# EAGLE board TeensyServoController (EAGLE 7.2.0)
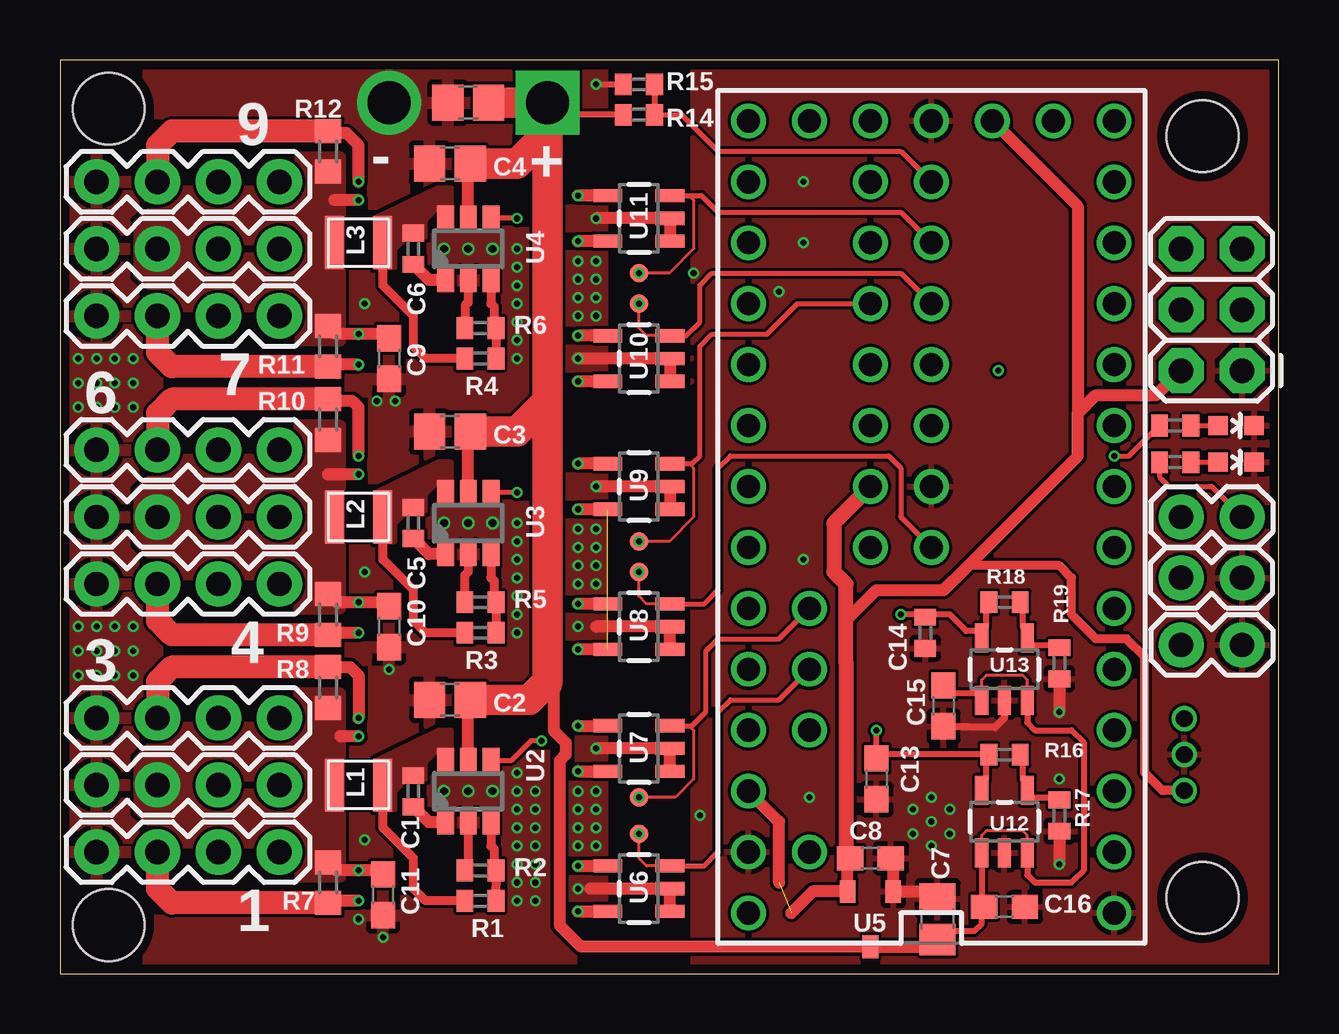
[diagram p0: board, top side]
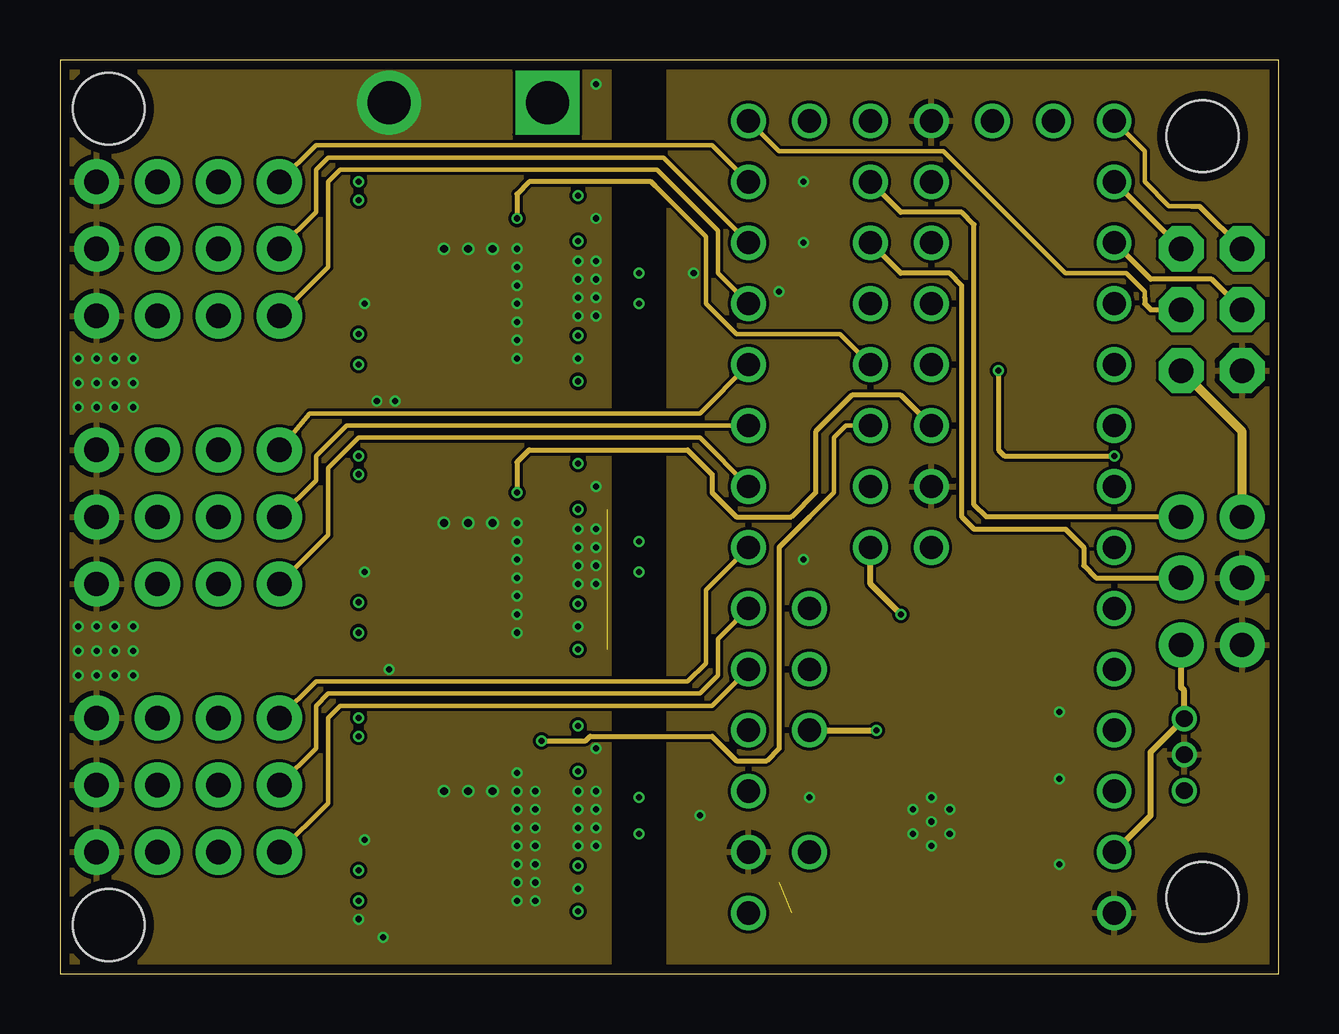
[diagram p1: board, inner layer Route2]
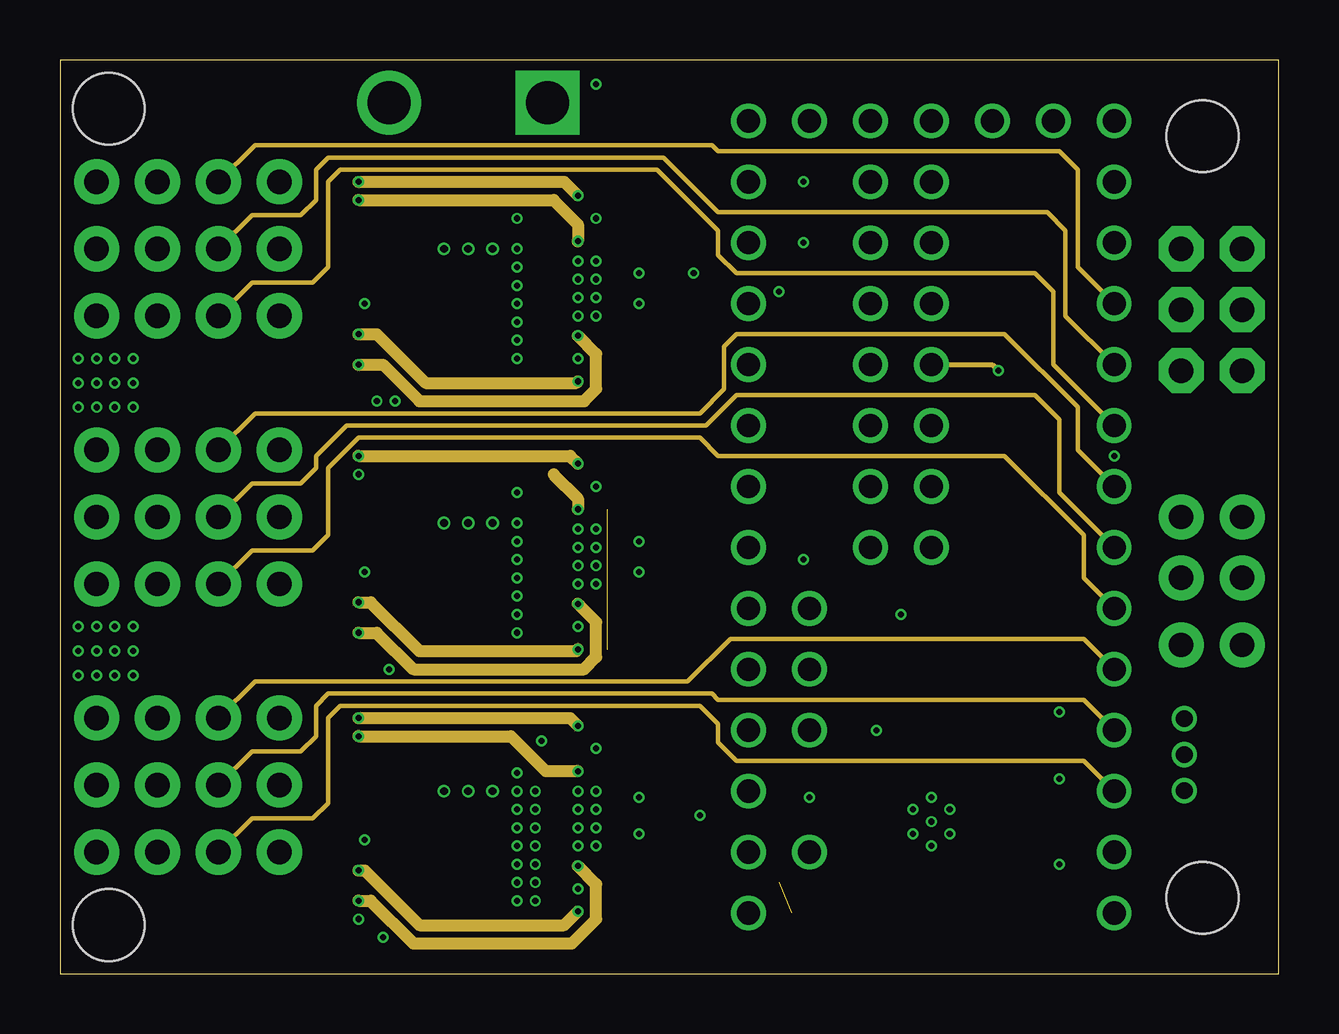
[diagram p2: board, inner layer Route15]
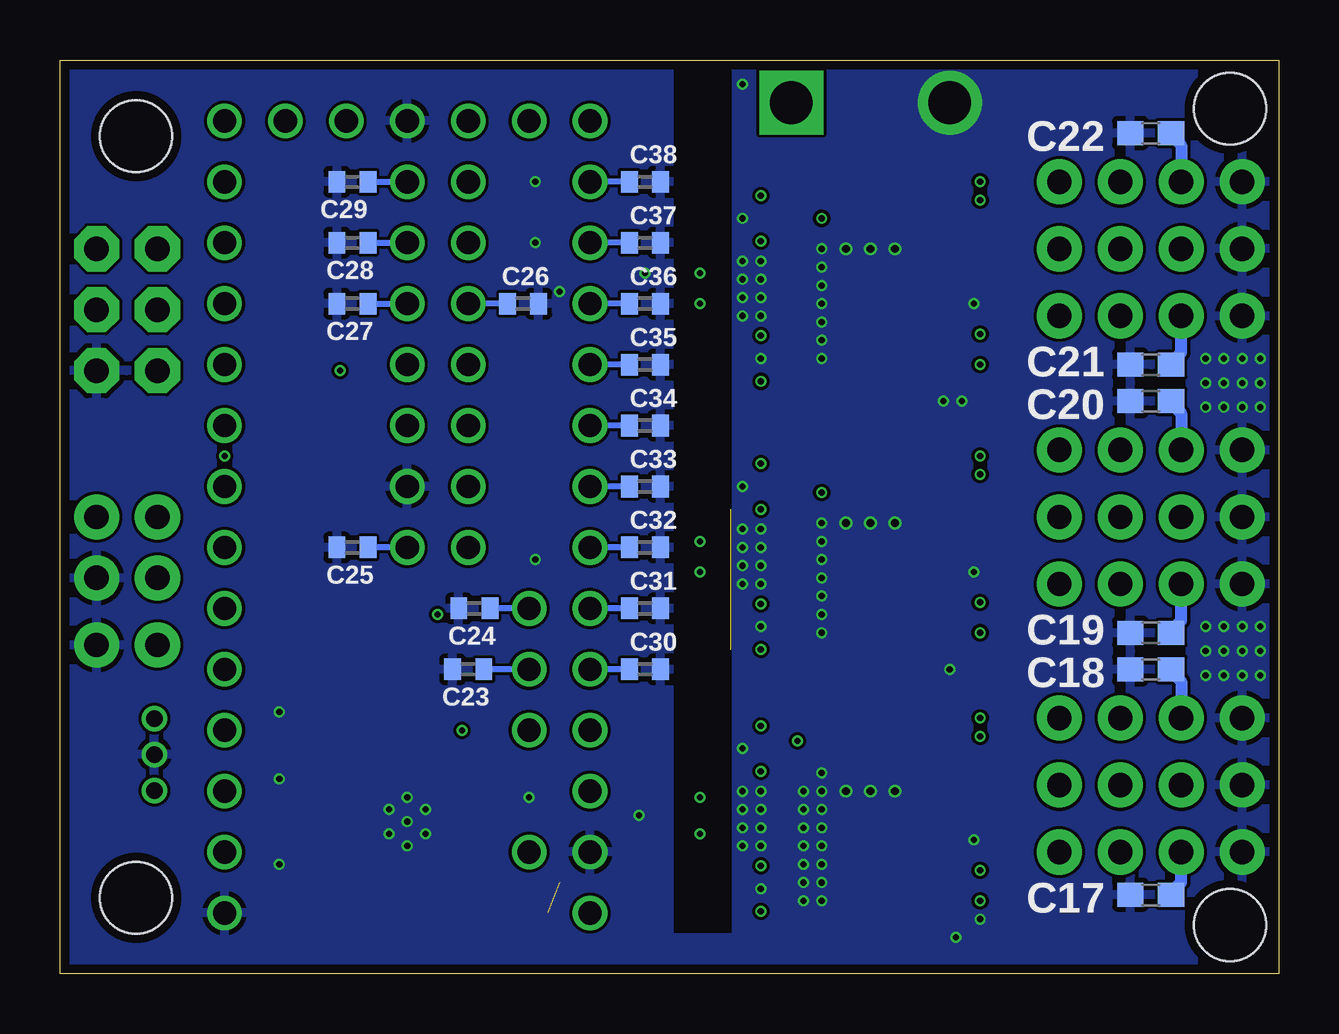
[diagram p3: board, bottom side, seen from below]

Size 50.8 x 38.1 mm. Coordinates in mm from the lower left corner, seen from the top.
Outline: 0,0 50.8,0 50.8,38.1 0,38.1 0,0
Copper layers (1*2*15*16): Top 0.035559375mm / dielectric 0.17018125mm / Route2 0.01778125mm / dielectric 47mil / Route15 0.01778125mm / dielectric 0.17018125mm / Bottom 0.035559375mm
Design rules "OSHPark-4layer *": minimum track width 5mil, minimum drill 10mil, track to track 5mil, track to pad 5mil, pad to pad 5mil, via to via 5mil, smd to smd 5mil, copper to edge 15mil, drill to drill 6mil, minimum pad ring 4mil, minimum via ring 4mil, stop-mask expansion 4mil, vias tented up to drill 25mil, thermal gap 8mil
Holes 3 mm at 47.62,34.92 47.62,3.17 2.03,36.07 2.03,2.03

## Footprints (pad centres in the part's own frame; a part is rotated, then mirrored left to right if it is on the bottom)
C0402 = smd 0.7 x 0.9: 1 -0.65,0; 2 0.65,0
C0805 = smd 1.3 x 1.5: 1 -0.85,0; 2 0.85,0
C0603 = smd 1.1 x 1: 1 -0.85,0; 2 0.85,0
1X04 = drill 1.016 pad 1.88: 1 0,0; 2 2.54,0; 3 5.08,0; 4 7.62,0
1X02 = drill 1.016 pad 1.88: 1 0,0; 2 2.54,0
3-PIN_JST_ZH_CONNECTOR_TH = drill 0.7: P$1 -1.5,1.6; P$2 0,1.6; P$3 1.5,1.6
2X3 = drill 1.016 pad 1.88 octagon: 1 0,0; 2 0,2.54; 3 2.54,0; 4 2.54,2.54; 5 5.08,0; 6 5.08,2.54
1008 = smd 0.8 x 2.2: P$1 -1,0; P$2 1,0
LED-0603 = smd 0.8 x 0.8: A 0,-0.75; C 0,0.75
R0402 = smd 0.7 x 0.9: 1 -0.65,0; 2 0.65,0
R0603 = smd 1 x 1.1: 1 -0.85,0; 2 0.85,0
PAD.03X.03 = smd 0.762 x 0.762: P$1 0,0
TEENSY_3.0_ALLPINS = drill 0.965: 0 -7.62,13.97; 1 -7.62,11.43; 2 -7.62,8.89; 3 -7.62,6.35; 3.3V 7.62,11.43; 3.3V1 -2.54,-16.51; 3.3V2 2.54,-1.27; 4 -7.62,3.81; 5 -7.62,1.27; 6 -7.62,-1.27; 7 -7.62,-3.81; 8 -7.62,-6.35; 9 -7.62,-8.89; 10 -7.62,-11.43; 11 -7.62,-13.97; 12 -7.62,-16.51; 13 7.62,-16.51; 14/A0 7.62,-13.97; 15/A1 7.62,-11.43; 16/A2 7.62,-8.89; 17/A3 7.62,-6.35; 18/A4 7.62,-3.81; 19/A5 7.62,-1.27; 20/A6 7.62,1.27; 21/A7 7.62,3.81; 22/A8 7.62,6.35; 23/A9 7.62,8.89; 24 0,-3.81; 25 0,-6.35; 26 0,-8.89; 27 0,-11.43; 28 0,-13.97; 29 2.54,-13.97; 30 2.54,-11.43; 31 2.54,-8.89; 32 2.54,-6.35; 33 2.54,-3.81; A10 5.08,6.35; A11 5.08,3.81; A12 0,1.27; A13 2.54,1.27; AGND 7.62,13.97; AREF 5.08,8.89; GND -7.62,16.51; GND1 0,-16.51; GND2 0,-1.27; PGM 2.54,-16.51; RESET 5.08,-16.51; VBAT -5.08,-16.51; VIN 7.62,16.51; VUSB 5.08,13.97
SOT-23-6 = smd 0.7 x 1: 1 -0.95,-1.3; 2 0,-1.3; 3 0.95,-1.3; 4 0.95,1.3; 5 0,1.3; 6 -0.95,1.3
SOT23 = smd 0.65 x 0.95: P$1 -0.95,-1.15; P$2 0.95,-1.15; P$3 0,1.15
SOT23-5 = smd 0.55 x 1.2: 1 -0.95,-1.3; 2 0,-1.3; 3 0.95,-1.3; 4 0.95,1.3; 5 -0.95,1.3

## Placement (x,y rotation side)
C1  10nF  [C0402]  14.73,7.62 270 top
C2  10uF  [C0805]  16.26,11.43 180 top
C3  10uF  [C0805]  16.26,22.61 180 top
C4  10uF  [C0805]  16.26,33.78 180 top
C5  10nF  [C0402]  14.73,18.8 270 top
C6  10nF  [C0402]  14.73,30.23 270 top
C7  10uF  [C0805]  36.58,2.29 90 top
C8  1uF  [C0603]  33.78,4.83 0 top
C9  22uF  [C0603]  13.72,25.65 270 top
C10  22uF  [C0603]  13.72,14.48 270 top
C11  22uF  [C0603]  13.46,3.3 270 top
C12  22uF  [C0805]  17.02,36.32 180 top
C13  1uF  [C0603]  34.04,8.14 270 top
C14  0.1uF  [C0402]  36.07,14.22 270 top
C15  0.1uF  [C0603]  36.83,11.18 270 top
C16  1uF  [C0603]  39.37,2.79 0 top
C17  1uF  [C0603]  5.33,3.3 180 bottom
C18  1uF  [C0603]  5.33,12.7 180 bottom
C19  1uF  [C0603]  5.33,14.22 180 bottom
C20  1uF  [C0603]  5.33,23.88 180 bottom
C21  1uF  [C0603]  5.33,25.4 180 bottom
C22  1uF  [C0603]  5.33,35.05 180 bottom
C23  0.1uF  [C0402]  33.78,12.7 180 bottom
C24  0.1uF  [C0402]  33.53,15.24 180 bottom
C25  0.1uF  [C0402]  38.61,17.78 180 bottom
C26  0.1uF  [C0402]  31.5,27.94 0 bottom
C27  0.1uF  [C0402]  38.61,27.94 180 bottom
C28  0.1uF  [C0402]  38.61,30.48 180 bottom
C29  0.1uF  [C0402]  38.61,33.02 180 bottom
C30  0.1uF  [C0402]  26.42,12.7 0 bottom
C31  0.1uF  [C0402]  26.42,15.24 0 bottom
C32  0.1uF  [C0402]  26.42,17.78 0 bottom
C33  0.1uF  [C0402]  26.42,20.32 0 bottom
C34  0.1uF  [C0402]  26.42,22.86 0 bottom
C35  0.1uF  [C0402]  26.42,25.4 0 bottom
C36  0.1uF  [C0402]  26.42,27.94 0 bottom
C37  0.1uF  [C0402]  26.42,30.48 0 bottom
C38  0.1uF  [C0402]  26.42,33.02 0 bottom
JP1  [1X04]  1.52,5.08 0 top
JP2  [1X04]  1.52,7.87 0 top
JP3  [1X04]  1.52,10.67 0 top
JP4  [1X04]  1.52,16.26 0 top
JP5  [1X04]  1.52,19.05 0 top
JP6  [1X04]  1.52,21.84 0 top
JP7  [1X04]  1.52,27.43 0 top
JP8  [1X04]  1.52,30.23 0 top
JP9  [1X04]  1.52,33.02 0 top
JP10  [1X02]  46.74,13.72 0 top
JP11  3-PIN_JST_ZH_PTH_CONNECTORRIGHT_ANGLE_PTH  [3-PIN_JST_ZH_CONNECTOR_TH]  48.46,9.14 90 top
JP12  [2X3]  49.28,25.15 90 top
JP14  [1X02]  46.74,19.05 0 top
JP15  [1X02]  49.28,16.51 180 top
L1  4.7uH  [1008]  12.45,7.87 180 top
L2  4.7uH  [1008]  12.45,19.05 180 top
L3  4.7uH  [1008]  12.45,30.48 180 top
LED1  red  [LED-0603]  49.02,21.34 270 top
LED2  blue  [LED-0603]  49.02,22.86 270 top
R1  349k  [R0402]  17.53,3.05 180 top
R2  49.9k  [R0402]  17.53,4.32 0 top
R3  349k  [R0402]  17.53,14.22 180 top
R4  349k  [R0402]  17.53,25.65 180 top
R5  49.9k  [R0402]  17.53,15.49 0 top
R6  49.9k  [R0402]  17.53,26.92 0 top
R7  0.027  [R0603]  11.18,3.81 270 top
R8  0.027  [R0603]  11.18,11.94 90 top
R9  0.027  [R0603]  11.18,14.99 270 top
R10  0.027  [R0603]  11.18,23.11 90 top
R11  0.027  [R0603]  11.18,26.16 270 top
R12  0.027  [R0603]  11.18,34.29 90 top
R13  [R0402]  46.48,21.34 180 top
R14  150k  [R0402]  24.13,35.81 180 top
R15  49.9k  [R0402]  24.13,37.08 0 top
R16  [R0402]  39.37,9.14 180 top
R17  255k  [R0402]  41.66,6.6 90 top
R18  [R0402]  39.37,15.49 180 top
R19  255k  [R0402]  41.66,12.95 90 top
R20  91  [R0402]  46.48,22.86 180 top
TP1  [PAD.03X.03]  24.13,5.84 0 top
TP2  [PAD.03X.03]  24.13,7.37 0 top
TP3  [PAD.03X.03]  24.13,16.76 0 top
TP4  [PAD.03X.03]  24.13,18.03 0 top
TP5  [PAD.03X.03]  24.13,27.94 0 top
TP6  [PAD.03X.03]  24.13,29.21 0 top
U1  TEENSY_3.1_ALLPINS  [TEENSY_3.0_ALLPINS]  36.32,19.05 180 top
U2  AP3211KTR-G1  [SOT-23-6]  17.02,7.62 0 top
U3  AP3211KTR-G1  [SOT-23-6]  17.02,18.8 0 top
U4  AP3211KTR-G1  [SOT-23-6]  17.02,30.23 0 top
U5  AP2210N-3.3TRG1  [SOT23]  33.78,2.29 180 top
U6  [SOT23-5]  24.13,3.56 90 top
U7  [SOT23-5]  24.13,9.4 90 top
U8  [SOT23-5]  24.13,14.48 90 top
U9  [SOT23-5]  24.13,20.32 90 top
U10  [SOT23-5]  24.13,25.65 90 top
U11  [SOT23-5]  24.13,31.5 90 top
U12  MIC5225  [SOT23-5]  39.37,6.35 0 top
U13  MIC5225  [SOT23-5]  39.37,12.7 0 top

## Library data of the parts
C1-C38 R1-R20 = resistor
JP1-JP10 JP12 JP14 JP15 = SparkFun-Connectors
JP11 U2-U13 = My Parts
L1-L3 = inductors
LED1 LED2 = SparkFun-LED
TP1-TP6 = SparkFun-Passives
U1 = Teensy3.0

## Nets
ANALOG-1: C30.1 JP1.4 U1.22/A8
ANALOG-2: C31.1 JP2.4 U1.21/A7
ANALOG-3: C32.1 JP3.4 U1.20/A6
ANALOG-4: C33.1 JP4.4 U1.19/A5
ANALOG-5: C34.1 JP5.4 U1.18/A4
ANALOG-6: C35.1 JP6.4 U1.17/A3
ANALOG-7: C36.1 JP7.4 U1.16/A2
ANALOG-8: C37.1 JP8.4 U1.15/A1
ANALOG-9: C38.1 JP9.4 U1.14/A0
AREF: C13.1 R16.2 U1.AREF U12.5
AREF2: C14.1 R18.2 U1.A13 U13.5
BATT_SENSE: C29.1 R14.1 R15.2 U1.28
CS0: JP12.3 U1.10
CURRENT-1: C23.1 TP1.P$1 U1.A10 U6.3
CURRENT-3: C24.1 TP2.P$1 U1.A11 U7.3
CURRENT-4: C25.1 TP3.P$1 U1.A12 U8.3
CURRENT-6: C26.1 TP4.P$1 U1.31 U9.3
CURRENT-7: C27.1 TP5.P$1 U1.26 U10.3
CURRENT-9: C28.1 TP6.P$1 U1.27 U11.3
EN-1: U1.33 U2.4
EN-2: U1.24 U3.4
EN-3: U1.32 U4.4
GND: C2.2 C3.2 C4.2 C7.2 C8.2 C9.2 C10.2 C11.2 C12.2 C13.2 C14.2 C15.2 C16.2 C17.2 C18.2 C19.2 C20.2 C21.2 C22.2 C23.2 C24.2 C25.2 C26.2 C27.2 C28.2 C29.2 C30.2 C31.2 C32.2 C33.2 C34.2 C35.2 C36.2 C37.2 C38.2 JP1.1 JP2.1 JP3.1 JP4.1 JP5.1 JP6.1 JP7.1 JP8.1 JP9.1 JP10.2 JP11.P$2 JP12.1 JP15.1 LED1.C LED2.C R2.1 R5.1 R6.1 R15.1 R17.1 R19.1 U1.AGND U1.GND U1.GND1 U1.GND2 U2.2 U3.2 U4.2 U5.P$1 U6.1 U6.2 U7.1 U7.2 U8.1 U8.2 U9.1 U9.2 U10.1 U10.2 U11.1 U11.2 U12.2 U13.2
I2C_SCL: JP14.1 U1.29
I2C_SDA: JP15.2 U1.30
MISO/MOSI: JP12.5 U1.12
MOSI/MISO: JP12.6 U1.11
N$1: LED1.A R13.1
N$6: R1.1 R2.2 U2.3
N$7: R16.1 R17.2 U12.4
N$8: R20.2 U1.25
N$9: R18.1 R19.2 U13.4
N$10: LED2.A R20.1
N$11: C5.1 L2.P$1 R3.2 U3.6
N$13: C1.1 L1.P$1 R1.2 U2.6
N$14: C1.2 U2.1
N$16: R4.1 R6.2 U4.3
N$17: C5.2 U3.1
N$18: R3.1 R5.2 U3.3
N$19: C6.2 U4.1
N$20: C6.1 L3.P$1 R4.2 U4.6
SAT-RX: JP10.1 JP11.P$3 U1.0
SCLK: JP12.4 U1.13
SERVO-1: JP1.3 U1.1
SERVO-1_VDD: C17.1 JP1.2 R7.2 U6.4
SERVO-2: JP2.3 U1.2
SERVO-3: JP3.3 U1.3
SERVO-3_VDD: C18.1 JP3.2 R8.2 U7.4
SERVO-4: JP4.3 U1.4
SERVO-4_VDD: C19.1 JP4.2 R9.2 U8.4
SERVO-5: JP5.3 U1.5
SERVO-6: JP6.3 U1.6
SERVO-6_VDD: C20.1 JP6.2 R10.2 U9.4
SERVO-7: JP7.3 U1.7
SERVO-7_VDD: C21.1 JP7.2 R11.2 U10.4
SERVO-8: JP8.3 U1.8
SERVO-9: JP9.3 U1.9
SERVO-9_VDD: C22.1 JP9.2 R12.2 U11.4
SERVO_VDD-1: C11.1 JP2.2 L1.P$2 R7.1 R8.1 U6.5 U7.5
SERVO_VDD-2: C10.1 JP5.2 L2.P$2 R9.1 R10.1 U8.5 U9.5
SERVO_VDD-3: C9.1 JP8.2 L3.P$2 R11.1 R12.1 U10.5 U11.5
VBAT: U1.VBAT
VCC: C2.1 C3.1 C4.1 C7.1 C12.1 C15.1 C16.1 R14.2 U2.5 U3.5 U4.5 U5.P$3 U12.1 U12.3 U13.1 U13.3
VDD: C8.1 JP11.P$1 JP12.2 JP14.2 R13.2 U1.3.3V U1.3.3V1 U1.3.3V2 U5.P$2
VIN: U1.VIN
VUSB: U1.VUSB

## Tracks (layer width: path | path; a pad name or v marks a point on that pad's centre or on a via)
ANALOG-1
  Route2 0.191: JP1.4 11.18,7.11 11.18,10.67 11.68,11.18 27.18,11.18 U1.22/A8
  Bottom 0.254: C30.1 U1.22/A8
ANALOG-2
  Route2 0.191: JP2.4 10.67,9.4 10.67,11.18 11.18,11.68 26.67,11.68 27.43,12.45 27.43,13.97 U1.21/A7
  Bottom 0.254: C31.1 U1.21/A7
ANALOG-3
  Route2 0.191: JP3.4 10.67,12.19 26.16,12.19 26.92,12.95 26.92,16 U1.20/A6
  Bottom 0.254: C32.1 U1.20/A6
ANALOG-4
  Route2 0.191: JP4.4 11.18,18.29 11.18,21.08 12.45,22.35 26.67,22.35 U1.19/A5
  Bottom 0.254: C33.1 U1.19/A5
ANALOG-5
  Route2 0.191: U1.18/A4 11.94,22.86 10.67,21.59 10.67,20.57 JP5.4
  Bottom 0.254: C34.1 U1.18/A4
ANALOG-6
  Route2 0.191: JP6.4 10.41,23.37 26.67,23.37 U1.17/A3
  Bottom 0.254: C35.1 U1.17/A3
ANALOG-7
  Route2 0.191: U1.16/A2 27.43,29.21 27.43,30.99 24.89,33.53 11.68,33.53 11.18,33.02 11.18,29.46 JP7.4
  Bottom 0.254: C36.1 U1.16/A2
ANALOG-8
  Route2 0.191: JP8.4 10.67,31.75 10.67,33.53 11.18,34.04 25.15,34.04 U1.15/A1
  Bottom 0.254: C37.1 U1.15/A1
ANALOG-9
  Route2 0.191: U1.14/A0 27.18,34.54 10.67,34.54 JP9.4
  Bottom 0.254: C38.1 U1.14/A0
AREF  (via drill 0.25)
  Top 0.254: v34.04,10.16 C13.1 34.18,9.14 R16.2 38.61,9.03 38.61,8.13 38.42,7.94 U12.5
  Route2 0.254: U1.AREF v34.04,10.16
AREF2  (via drill 0.25)
  Top 0.254: v35.05,14.99 35.81,14.99 35.93,14.87 C14.1 36.18,14.99 37.08,14.99 37.78,14.29 38.42,14.29 | U13.5 38.42,14.29 | 38.42,14.29 38.61,14.48 38.61,15.38 R18.2
  Route2 0.254: v35.05,14.99 33.78,16.26 U1.A13
BATT_SENSE
  Top 0.203: R14.1 25.91,35.81 27.43,34.29 35.05,34.29 U1.28
  Top 0.254: R15.2 R14.1
  Bottom 0.254: C29.1 U1.28
CS0
  Route2 0.203: JP12.3 48.01,28.96 45.47,28.96 U1.10
CURRENT-1  (via drill 0.25)
  Top 0.127: U6.3 24.45,4.51 24.13,4.83 TP1.P$1
  Top 0.203: U6.3 26.86,4.51 27.43,5.08 27.43,10.92 27.94,11.43 29.97,11.43 U1.A10
  Bottom 0.254: U1.A10 C23.1
  other vias: 24.13,5.84
CURRENT-3  (via drill 0.25)
  Top 0.127: U7.3 26.23,10.35 26.42,10.16 26.42,8.13 25.65,7.37 TP2.P$1
  Top 0.203: U7.3 26.35,10.35 26.92,10.92 26.92,13.46 27.43,13.97 29.97,13.97 U1.A11
  Bottom 0.254: U1.A11 C24.1
  other vias: 24.13,7.37
CURRENT-4  (via drill 0.25)
  Top 0.127: U8.3 24.45,15.43 24.13,15.75 TP3.P$1
  Top 0.203: U8.3 26.86,15.43 27.43,16 27.43,21.08 27.94,21.59 34.54,21.59 35.05,21.08 35.05,19.05 U1.A12
  Bottom 0.254: U1.A12 C25.1
  other vias: 24.13,16.76
CURRENT-6  (via drill 0.25)
  Top 0.127: U9.3 26.23,21.27 26.42,21.08 26.42,19.05 25.4,18.03 TP4.P$1
  Top 0.203: U9.3 26.35,21.27 26.67,21.59 26.67,26.16 27.18,26.67 29.46,26.67 30.73,27.94 U1.31
  Bottom 0.254: C26.1 U1.31
  other vias: 24.13,18.03
CURRENT-7  (via drill 0.25)
  Top 0.127: U10.3 24.45,26.6 24.13,26.92 TP5.P$1
  Top 0.203: U10.3 26.1,26.6 26.67,27.18 26.67,28.7 27.18,29.21 35.05,29.21 U1.26
  Bottom 0.254: C27.1 U1.26
  other vias: 24.13,27.94
CURRENT-9  (via drill 0.25)
  Top 0.127: U11.3 26.23,32.45 26.42,32.26 26.42,30.23 25.4,29.21 TP6.P$1
  Top 0.203: U11.3 26.74,32.45 27.43,31.75 35.05,31.75 U1.27
  Bottom 0.254: C28.1 U1.27
  other vias: 24.13,29.21
EN-1  (via drill 0.25)
  Top 0.203: v20.07,9.72 19.63,9.72 18.8,8.89 18,8.89 U2.4
  Route2 0.191: U1.33 32.77,22.86 32.26,22.35 32.26,20.07 31.24,19.05
  Route2 0.203: 31.24,19.05 29.97,17.78 29.97,9.4 29.46,8.89 28.19,8.89 27.18,9.91 22.1,9.91 21.91,9.72 v20.07,9.72
EN-2  (via drill 0.25)
  Top 0.203: v19.05,20.07 18,20.07 U3.4
  Route2 0.203: U1.24 35.05,24.13 33.02,24.13 31.5,22.61 31.5,20.07 30.48,19.05 28.19,19.05 27.18,20.07 27.18,20.83 26.16,21.84 19.56,21.84 19.05,21.34 v19.05,20.07
EN-3  (via drill 0.25)
  Top 0.203: v19.05,31.5 17.97,31.5 U4.4
  Route2 0.191: U1.32 32.51,26.67 28.19,26.67 26.92,27.94 26.92,30.73 24.82,32.83
  Route2 0.203: 24.82,32.83 24.64,33.02 19.56,33.02 19.05,32.51 v19.05,31.5
GND  (via drill 0.25, 0.33, 1.78)
  Top 0.254: v22.35,37.08 R15.1
  Top 0.318: C15.2 38.97,10.27 39.37,10.67 U13.2
  Top 0.381: U2.2 17.02,4.07 R2.1 | U4.2 17.02,28 16.89,27.88 16.89,26.94 R6.1 | U3.2 17.02,16.76 16.88,16.62 R5.1
  Top 0.508: C4.2 15.41,34.12 | U6.1 U6.2 22.1,3.56 | U7.1 U7.2 v22.35,9.4 | U8.1 U8.2 22.35,14.48 | v22.35,20.32 U9.2 U9.1 | v21.59,25.65 U10.2 U10.1 | v22.35,31.5 U11.2 U11.1 | C7.2 36.28,3.44 U5.P$1 34.73,4.53 C8.2 | R17.1 v41.66,4.57 | R19.1 v41.66,10.92
  other vias: 17.02,7.62 17.02,18.8 17.02,30.23 16,7.62 18.03,7.62 18.03,18.8 16,18.8 18.03,30.23 16,30.23 13.72,36.32 21.59,14.48 21.59,3.56 12.7,27.94 12.7,16.76 12.7,5.59 13.46,1.52 13.21,23.88 13.97,23.88 13.72,12.7 12.45,2.29 19.05,18.8 19.05,18.03 19.05,17.27 19.05,16.51 19.05,15.75 19.05,14.99 19.05,14.22 19.05,7.62 19.05,6.86 19.05,6.1 19.05,5.33 19.05,4.57 19.05,3.81 19.05,3.05 19.05,30.23 19.05,29.46 19.05,28.7 19.05,27.94 19.05,27.18 19.05,26.42 19.05,25.65 19.81,3.05 19.81,3.81 19.81,4.57 19.81,5.33 19.81,6.1 19.81,6.86 19.81,7.62 19.05,8.38 0.76,12.45 0.76,13.46 0.76,14.48 1.52,13.46 1.52,14.48 2.29,14.48 3.05,14.48 2.29,13.46 3.05,13.46 1.52,12.45 2.29,12.45 3.05,12.45 0.76,24.64 1.52,24.64 2.29,24.64 3.05,24.64 3.05,25.65 2.29,25.65 1.52,25.65 0.76,25.65 0.76,23.62 1.52,23.62 2.29,23.62 3.05,23.62 21.59,29.72 21.59,28.96 21.59,28.19 21.59,27.43 22.35,29.72 22.35,28.96 22.35,28.19 22.35,27.43 21.59,18.54 21.59,17.78 21.59,17.02 21.59,16.26 22.35,16.26 22.35,17.02 22.35,17.78 22.35,18.54 21.59,7.62 21.59,6.86 21.59,6.1 21.59,5.33 22.35,5.33 22.35,6.1 22.35,6.86 22.35,7.62 31.24,7.37 30.99,17.27 41.66,8.13 26.67,6.6 29.97,28.45 30.99,30.48 30.99,33.02 26.42,29.21 35.56,6.86 37.08,6.86 37.08,5.84 35.56,5.84 36.32,6.35 36.32,7.37 36.32,5.33
  pour Bottom (rank 6): 0,38.1 0,0 25.4,0 25.4,1.52 22.61,1.52 22.61,38.1
  pour Top: 16.76,5.59 16.76,6.1 16.51,6.35 16,6.35 15.75,6.6 15.75,8.64 16,8.89 18.03,8.89 18.29,8.64 18.29,6.6 18.03,6.35 17.53,6.35 17.27,6.1 17.27,5.59
  pour Top: 16.76,16.76 16.76,17.27 16.51,17.53 16,17.53 15.75,17.78 15.75,19.81 18.29,19.81 18.29,17.78 18.03,17.53 17.53,17.53 17.27,17.27 17.27,16.76
  pour Top: 16.76,28.19 16.76,28.7 16.51,28.96 16,28.96 15.75,29.21 15.75,31.24 16,31.5 18.03,31.5 18.29,31.24 18.29,29.21 18.03,28.96 17.53,28.96 17.27,28.7 17.27,28.19
  pour Top (rank 6): 0,0 22.61,0 22.61,38.1 0,38.1
  pour Bottom (rank 6): 50.8,0 25.4,0 25.4,38.1 50.8,38.1
  pour Top: 26.42,38.1 50.8,38.1 50.8,0 26.42,0
  pour Route2: 25.4,38.1 50.8,38.1 50.8,0 25.4,0
  pour Route2: 0,38.1 22.86,38.1 22.86,0 0,0
I2C_SCL
  Route2 0.203: U1.29 35.05,31.75 37.59,31.75 38.1,31.24 38.1,19.56 38.61,19.05 JP14.1
I2C_SDA
  Route2 0.203: U1.30 35.05,29.21 37.08,29.21 37.59,28.7 37.59,19.05 38.1,18.54 41.91,18.54 42.67,17.78 42.67,17.02 43.18,16.51 JP15.2
MISO/MOSI
  Route2 0.191: U1.12 45.21,34.29 45.21,33.02 46.23,32 47.16,32
  Route2 0.203: 47.16,32 47.5,32 JP12.5
MOSI/MISO
  Route2 0.203: JP12.6 U1.11
N$1
  Top 0.203: R13.1 LED1.A
N$2
  cutout Top: 11.94,18.03 12.95,18.03 12.95,20.07 11.94,20.07
N$3
  cutout Top: 11.94,29.46 12.95,29.46 12.95,31.5 11.94,31.5
N$4
  cutout Top: 11.94,6.86 12.95,6.86 12.95,8.89 11.94,8.89
N$5
  cutout Top: 14.99,5.84 14.99,3.56 15.24,3.3 17.53,3.3 17.53,5.84
  cutout Top: 14.99,17.02 14.99,14.73 15.24,14.48 17.53,14.48 17.53,17.02
  cutout Top: 14.99,28.45 14.99,26.16 15.24,25.91 17.53,25.91 17.53,28.45
N$6
  Top 0.381: U2.3 17.97,5.34 18.1,5.21 18.1,3.96 R2.2 18.16,3.05 R1.1
N$7
  Top 0.254: 41.4,7.37 41.51,7.25 R17.2 41.54,7.37 40.39,7.37 40.32,7.43 U12.4 40.32,7.94 40.13,8.13 40.13,9.03 R16.1
N$8  (via drill 0.25)
  Top 0.203: v43.94,21.59 44.56,21.59 R20.2
  Route2 0.203: v39.12,25.15 39.12,21.84 39.37,21.59 v43.94,21.59
  Route15 0.203: U1.25 38.86,25.4 v39.12,25.15
N$9
  Top 0.254: R18.1 40.13,15.38 40.13,14.48 40.32,14.29 U13.4 40.32,13.78 40.39,13.72 41.4,13.72 41.51,13.6 R19.2
N$10
  Top 0.203: R20.1 LED2.A
N$11
  Top 0.381: R3.2 15.24,14.22 14.73,14.73 14.73,16 13.46,17.27 13.46,19.03 L2.P$1
  pour Top (no thermals): 16.32,21.34 15.75,21.34 13.14,20.07 13.14,18.03 13.97,18.03 13.97,18.8 14.48,19.3 15.24,19.3 15.24,20 15.75,20.51 16.32,20.51
N$13
  Top 0.381: 14.99,8.41 C1.1 | R1.2 15.24,3.05 14.73,3.56 14.73,4.83 13.46,6.1 13.46,7.86 L1.P$1
  pour Top (no thermals): 16.32,10.16 15.75,10.16 13.14,8.89 13.14,6.86 13.97,6.86 13.97,7.62 14.48,8.13 15.24,8.13 15.24,8.83 15.75,9.33 16.32,9.33
N$14
  Top 0.508: U2.1 15.38,6.32 C1.2
N$16
  Top 0.381: U4.3 17.97,27.94 18.1,27.81 18.1,27 R6.2 R4.1
N$17
  Top 0.508: U3.1 15.38,17.5 C5.2
N$18
  Top 0.381: U3.3 17.97,16.51 18.1,16.38 18.1,15.57 R5.2 R3.1
N$19
  Top 0.508: U4.1 15.38,28.93 C6.2
N$20
  Top 0.381: R4.2 15.24,25.65 14.73,26.16 14.73,27.43 13.46,28.7 13.46,30.46 L3.P$1
  pour Top (no thermals): 16.32,32.77 15.75,32.77 13.14,31.5 13.14,29.46 13.97,29.46 13.97,30.23 14.48,30.73 15.24,30.73 15.24,31.43 15.75,31.94 16.32,31.94
SAT-RX
  Route2 0.254: U1.0 45.47,6.6 45.47,9.25 JP11.P$3 46.86,11.81 46.74,11.94 JP10.1
SCLK
  Route2 0.191: 45.21,28.19 45.21,28.45 44.45,29.21 41.91,29.21 36.83,34.29 29.97,34.29 U1.13
  Route2 0.203: 45.21,28.19 45.21,27.94 45.47,27.69 JP12.4
SERVO-1
  Route15 0.191: JP1.3 8,6.48 10.54,6.48 11.18,7.11 11.18,10.67 11.68,11.18 26.67,11.18 27.43,10.41 27.43,9.65 28.19,8.89 42.67,8.89 U1.1
SERVO-1_VDD  (via drill 0.25)
  Top 0.508: v12.45,3.05 11.26,3.05 R7.2 | v21.59,4.51 U6.4
  Top 0.953: R7.2 4.66,2.96 4.06,3.56 JP1.2
  Route15 0.508: v12.45,3.05 12.95,3.05 14.73,1.27 21.34,1.27 22.35,2.29 22.35,3.74 v21.59,4.51
  Bottom 0.508: C17.1 4.48,3.39 4.06,3.81 JP1.2
SERVO-2
  Route15 0.191: JP2.3 8,9.27 10.03,9.27 10.67,9.91 10.67,11.18 11.18,11.68 27.18,11.68 27.43,11.43 42.67,11.43 U1.2
SERVO-3
  Route15 0.191: JP3.3 8.13,12.19 26.16,12.19 27.94,13.97 42.67,13.97 U1.3
SERVO-3_VDD  (via drill 0.25)
  Top 0.508: R8.2 12.1,12.79 12.45,12.45 v12.45,10.67 | v21.59,10.35 U7.4
  Top 0.953: R8.2 4.66,12.79 4.06,12.19 JP3.2
  Route15 0.508: v12.45,10.67 21.27,10.67 v21.59,10.35
  Bottom 0.508: C18.1 4.48,12.61 4.06,12.19 JP3.2
SERVO-4
  Route15 0.191: JP4.3 8,17.65 10.54,17.65 11.18,18.29 11.18,21.08 12.45,22.35 26.67,22.35 27.43,21.59 39.37,21.59 42.67,18.29 42.67,16.51 U1.4
SERVO-4_VDD  (via drill 0.25)
  Top 0.508: U8.4 v21.59,15.43 | v12.45,14.22 11.26,14.22 R9.2
  Top 0.953: R9.2 4.66,14.14 4.06,14.73 JP4.2
  Route15 0.508: v12.45,14.22 13.21,14.22 14.73,12.7 21.84,12.7 22.35,13.21 22.35,14.67 v21.59,15.43
  Bottom 0.508: C19.1 4.48,14.31 4.06,14.73 JP4.2
SERVO-5
  Route15 0.191: JP5.3 8,20.45 10.03,20.45 10.67,21.08 10.67,21.59 11.94,22.86 26.92,22.86 28.19,24.13 40.64,24.13 41.66,23.11 41.66,20.07 U1.5
SERVO-6
  Route15 0.191: JP6.3 8.13,23.37 26.67,23.37 27.69,24.38 27.69,26.16 28.19,26.67 39.37,26.67 42.42,23.62 42.42,21.84 U1.6
SERVO-6_VDD  (via drill 0.25)
  Top 0.508: U9.4 v21.59,21.27 | v12.45,21.59 12.45,23.62 12.19,23.88 11.26,23.88 R10.2
  Top 0.953: R10.2 4.66,23.96 4.06,23.37 JP6.2
  Route15 0.508: v12.45,21.59 21.27,21.59 v21.59,21.27
  Bottom 0.508: C20.1 4.48,23.79 4.06,23.37 JP6.2
SERVO-7
  Route15 0.191: JP7.3 8,28.83 10.54,28.83 11.18,29.46 11.18,33.02 11.68,33.53 24.89,33.53 27.43,30.99 27.43,29.97 28.19,29.21 40.64,29.21 41.4,28.45 41.4,25.4 U1.7
SERVO-7_VDD  (via drill 0.25)
  Top 0.508: U10.4 v21.59,26.6 | v12.45,25.4 11.26,25.4 R11.2
  Top 0.953: R11.2 4.66,25.31 4.06,25.91 JP7.2
  Route15 0.508: v12.45,25.4 13.46,25.4 14.99,23.88 21.84,23.88 22.35,24.38 22.35,25.84 v21.59,26.6
  Bottom 0.508: C21.1 4.48,25.49 4.06,25.91 JP7.2
SERVO-8
  Route15 0.191: JP8.3 8,31.62 10.03,31.62 10.67,32.26 10.67,33.53 11.18,34.04 25.15,34.04 27.43,31.75 41.15,31.75 41.91,30.99 41.91,27.43 U1.8
SERVO-9
  Route15 0.191: JP9.3 8.13,34.54 27.18,34.54 27.43,34.29 41.66,34.29 42.42,33.53 42.42,29.46 U1.9
SERVO-9_VDD  (via drill 0.25)
  Top 0.508: U11.4 v21.59,32.45 | v12.45,33.02 12.45,34.54 11.94,35.05 11.26,35.05 R12.2
  Top 0.953: R12.2 4.66,35.14 4.06,34.54 JP9.2
  Route15 0.508: v12.45,33.02 21.02,33.02 v21.59,32.45
  Bottom 0.508: C22.1 4.48,34.96 4.06,34.54 JP9.2
SERVO_VDD-1  (via drill 0.25)
  Top 0.508: v12.45,9.91 11.68,9.91 | v21.59,8.45 U7.5 | v21.59,2.61 U6.5 | R7.1 11.52,4.32 v12.45,4.32 13.72,4.32 13.55,4.15 C11.1
  Route15 0.508: v12.45,9.91 18.8,9.91 20.25,8.45 v21.59,8.45 | v12.45,4.32 12.7,4.32 14.99,2.03 21.02,2.03 v21.59,2.61
  pour Top (no thermals): 11.68,4.06 11.68,11.68 5.84,11.68 3.3,8.89 3.3,6.86 6.1,4.06
SERVO_VDD-2  (via drill 0.25)  (1 unrouted)
  Top 0.508: U8.5 v21.59,13.53 | R9.1 11.52,15.49 v12.45,15.49 13.72,15.49 13.55,15.33 C10.1 | U9.5 v21.59,19.37 | v12.45,20.83 11.18,20.83
  Route15 0.508: v12.45,15.49 12.95,15.49 14.99,13.46 21.52,13.46 v21.59,13.53 | 20.57,20.83 21.59,19.81 v21.59,19.37
  pour Top (no thermals): 11.68,15.24 11.68,22.86 6.1,22.86 3.3,20.07 3.3,18.03 6.1,15.24
SERVO_VDD-3  (via drill 0.25)
  Top 0.508: U10.5 v21.59,24.7 | R11.1 11.52,26.67 v12.45,26.67 13.97,26.67 13.8,26.5 C9.1 | U11.5 v21.59,30.55 | v12.45,32.26 11.43,32.26
  Route15 0.508: v12.45,26.67 13.21,26.67 15.24,24.64 21.52,24.64 v21.59,24.7 | v12.45,32.26 20.57,32.26 21.59,31.24 v21.59,30.55
  pour Top (no thermals): 11.68,26.42 11.68,34.04 6.1,34.04 3.3,31.24 3.3,29.21 6.1,26.42
VCC  (via drill 1.78)
  Top 0.127: U12.1 38.42,5.78 38.61,5.97 40.13,5.97 40.32,5.78 U12.3 | U13.1 38.42,12.26 38.61,12.45 40.13,12.45 40.32,12.26 U13.3
  Top 0.254: R14.2 20.32,35.81 | C7.1 36.92,1.78 38.1,1.78 38.42,2.1 38.42,3.09 | U13.3 40.32,10.48 40.64,10.16 42.16,10.16 42.67,9.65 42.67,4.32 42.16,3.81 40.64,3.81 40.32,4.13 U12.3 | 38.42,3.09 38.42,3.26 | 38.42,3.26 C16.1 38.42,3.09 | U12.1 38.42,3.26 | U13.1 38.42,11.62 38.35,11.68 36.92,11.68 C15.1
  Top 0.508: U2.5 17.02,11.34 C2.1 | U3.5 17.02,22.52 C3.1 | U4.5 17.02,33.95 C4.1 | 20.57,11.94 20.57,10.16 21.08,9.65 21.08,9.14 20.83,8.89 20.83,2.03 21.72,1.14 U5.P$3 36.28,1.14 C7.1
  Top 0.635: 20.32,12.19 20.57,11.94 20.57,12.95
  Top 1.27: 20.32,35.05 20.32,35.81 v20.32,36.32 C12.1 | 20.32,35.05 20.32,23.88 | C2.1 19.56,11.43 20.32,12.19 20.32,23.88 | C4.1 19.05,33.78 20.32,35.05 | C3.1 19.05,22.61 20.32,23.88
VDD  (1 unrouted)
  Top 0.203: R13.2 45.83,20.72 46.23,20.32 48.01,20.32 JP14.2
  Top 0.381: JP11.P$1 45.95,7.64 45.21,8.38 45.21,13.21 44.45,13.97 43.18,13.97 42.16,14.99 42.16,16.51 41.66,17.02 37.85,17.02 37.72,16.89
  Top 0.508: 29.97,3.81 29.97,6.35 U1.3.3V | 30.48,2.54 31.38,3.44 U5.P$2 32.83,4.53 | 32.83,4.53 32.83,4.57 32.77,4.64 | 32.83,4.53 C8.1 33.02,4.91 | 32.77,12.95 32.77,14.73 34.04,16 36.83,16 37.72,16.89 42.42,21.59 42.42,23.37 | JP12.2 45.66,24.13 43.18,24.13 42.42,23.37 | U1.3.3V1 42.42,32 42.42,23.37
  Top 0.635: U1.3.3V2 32.26,18.8 32.26,16.76 32.77,16.26 32.77,12.95 32.77,4.64
  Route2 0.381: JP14.2 49.28,22.61 JP12.2

## Text on the board
tNames: 9 | - | + | L3 | 7 | 6 | L2 | 4 | 3 | L1 | 1